# EAGLE board usb-power-switch (EAGLE 7.3.0)
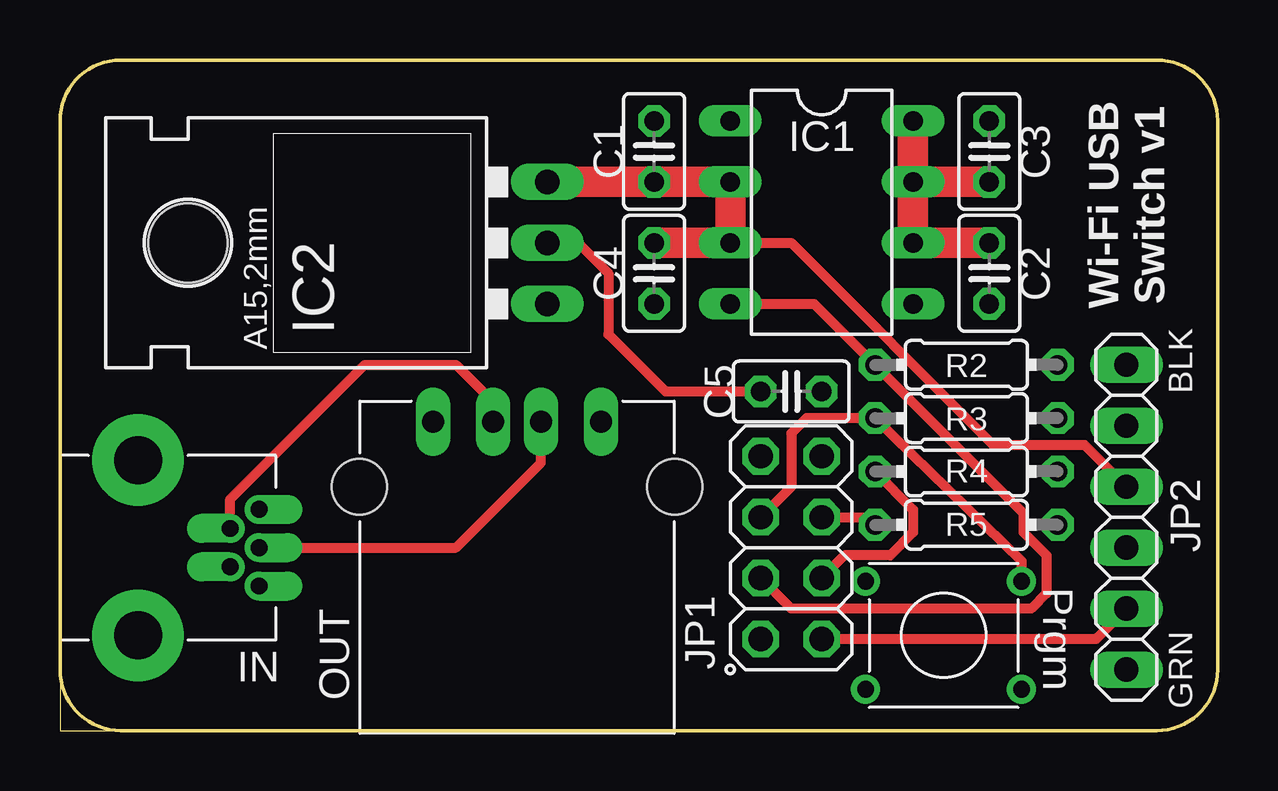
[diagram p0: board, top side]
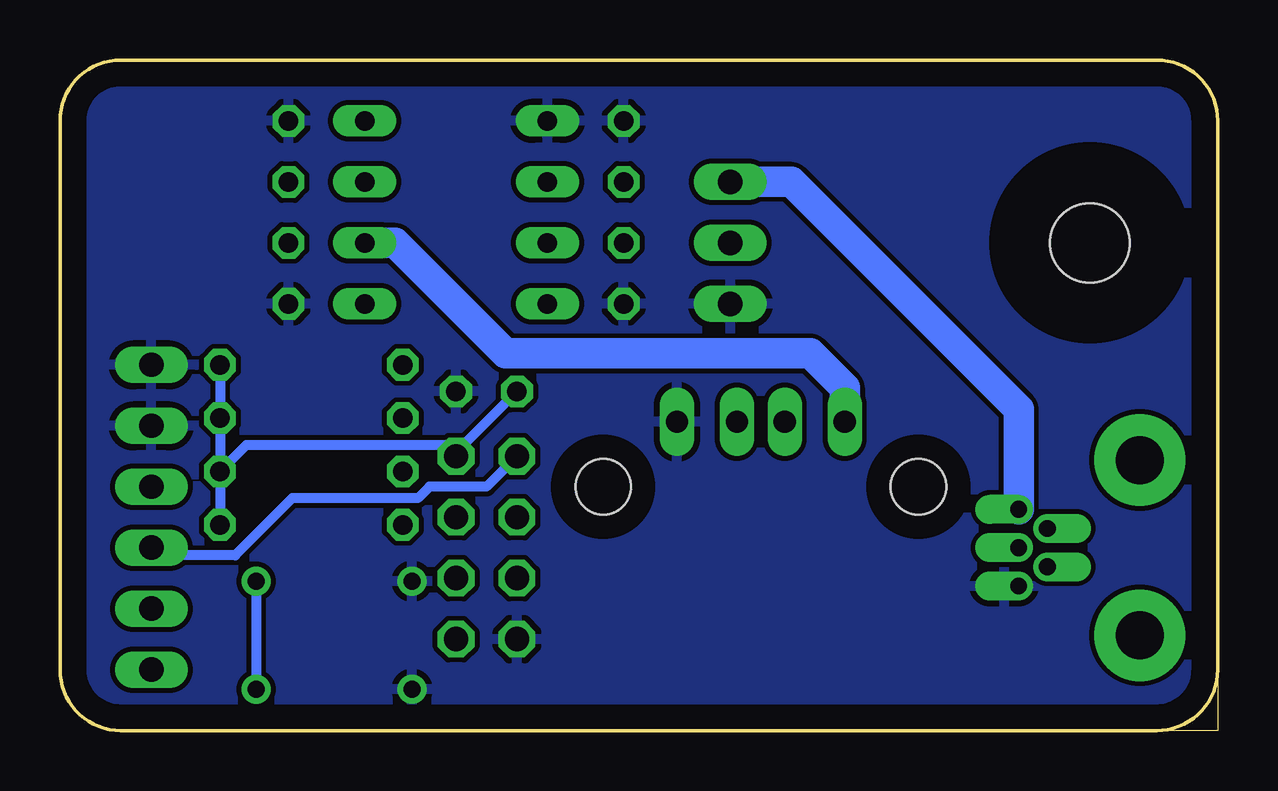
[diagram p1: board, bottom side, seen from below]

Size 48.26 x 27.94 mm. Coordinates in mm from the lower left corner, seen from the top.
Outline: 2.54,0 0,0 0,2.54
Outline: 2.54,0 45.72,0 arc90 48.26,2.54 48.26,25.4 arc90 45.72,27.94 2.54,27.94 arc90 0,25.4 0,2.54
Outline: 0,2.54 arc90 2.54,0
Copper layers (1*16): Top 0.035mm / dielectric 1.5mm / Bottom 0.035mm
Design rules "default": minimum track width 10mil, minimum drill 24mil, track to track 8mil, track to pad 8mil, pad to pad 8mil, via to via 8mil, smd to smd 8mil, copper to edge 40mil, drill to drill 8mil, minimum pad ring 10mil, minimum via ring 8mil, stop-mask expansion 4mil, vias tented up to drill 0mil, thermal gap 10mil

## Footprints (pad centres in the part's own frame; a part is rotated, then mirrored left to right if it is on the bottom)
C025-025X050 = drill 0.813 octagon: 1 -1.27,0; 2 1.27,0
DIL08 = drill 0.813 long: 1 -3.81,-3.81; 2 -1.27,-3.81; 3 1.27,-3.81; 4 3.81,-3.81; 5 3.81,3.81; 6 1.27,3.81; 7 -1.27,3.81; 8 -3.81,3.81
78XXL = drill 1.016 long: GND 0,-3.81; IN -2.54,-3.81; OUT 2.54,-3.81 | hole 3.302: 0,11.176
USB-MINI-B = drill 0.7 offset: D+ 0,8.3; D- -0.8,7.1; GND 1.6,8.3; ID 0.8,7.1; VBUS -1.6,8.3 | drill 2 pad 3.81: GND1 -3.65,3.25; GND4 3.65,3.25
2X04 = drill 1.016 octagon: 1 -3.81,-1.27; 2 -3.81,1.27; 3 -1.27,-1.27; 4 -1.27,1.27; 5 1.27,-1.27; 6 1.27,1.27; 7 3.81,-1.27; 8 3.81,1.27
1X06 = drill 1.016 long: 1 -6.35,0; 2 -3.81,0; 3 -1.27,0; 4 1.27,0; 5 3.81,0; 6 6.35,0
USB-A = drill 0.92 long: P$1 -3.5,2.71; P$2 -1,2.71; P$3 1,2.71; P$4 3.5,2.71 | hole 2.3: -6.57,0; 6.57,0
0204/7 = drill 0.813 octagon: 1 -3.81,0; 2 3.81,0
TACTILE-BUTTON-MJTP1230 = drill 0.7: P$1 -3.25,2.25; P$2 -3.25,-2.25; P$3 3.25,2.25; P$4 3.25,-2.25

## Placement (x,y rotation side)
C1  0.1uF  [C025-025X050]  24.77,24.13 90 top
C2  0.1uF  [C025-025X050]  38.73,19.05 270 top
C3  22uF  [C025-025X050]  38.73,24.13 90 top
C4  0.1uF  [C025-025X050]  24.77,19.05 270 top
C5  10uF  [C025-025X050]  30.48,14.13 0 top
IC1  TPS2024  [DIL08]  31.75,21.59 270 top
IC2  LD1117V33  [78XXL]  16.51,20.32 90 top
IN  USB-MINI-B  [USB-MINI-B]  0,7.62 270 top
JP1  ESP-01  [2X04]  30.48,7.62 90 top
JP2  FTDI 3.3V  [1X06]  44.45,8.89 270 top
OUT  USB-A  [USB-A]  19.05,10.16 0 top
R2  10K  [0204/7]  37.78,15.24 0 top
R3  10K  [0204/7]  37.78,13.02 0 top
R4  10K  [0204/7]  37.78,10.79 0 top
R5  10K  [0204/7]  37.78,8.57 0 top
S1  TACTILE-BUTTON-MJTP1230  [TACTILE-BUTTON-MJTP1230]  36.83,3.97 180 top

## Library data of the parts
C1-C5 R2-R5 = rcl
IC1 = ic-package
IC2 = SparkFun-PowerIC
IN OUT S1 = my-custom
JP1 JP2 = pinhead

## Nets
/EN: IC1.4 JP1.4 R2.1
CH_PD: JP1.3 R4.1
D+: IN.D+ OUT.P$3
D-: IN.D- OUT.P$2
DTR: JP2.6
GND: C1.2 C2.2 C3.2 C4.2 C5.2 IC1.1 IC2.IN IN.GND JP1.2 JP2.1 JP2.2 OUT.P$4 S1.P$3 S1.P$4
GPIO0: JP1.6 R3.1 S1.P$1 S1.P$2
RST: JP1.5 R5.1
RXI: JP1.8 JP2.4
TXO: JP1.1 JP2.5
VCC: C5.1 IC2.GND JP1.7 R2.2 R3.2 R4.2 R5.2
VIN: C1.1 C4.1 IC1.2 IC1.3 IC2.OUT IN.VBUS JP2.3
VOUT: C2.1 C3.1 IC1.6 IC1.7 IC1.8 OUT.P$1

## Tracks (layer width: path | path; a pad name or v marks a point on that pad's centre or on a via)
/EN
  Top 0.406: IC1.4 31.43,17.78 R2.1 40.16,9.05 40.16,8.26 41.12,7.3 41.12,5.71 40.48,5.08 30.48,5.08 JP1.4
CH_PD
  Top 0.406: R4.1 35.56,9.21 35.56,8.26 34.61,7.3 32.7,7.3 JP1.3
D+
  Top 0.406: IN.D+ 16.51,7.62 20.05,11.16 OUT.P$3
D-
  Top 0.406: IN.D- 7.1,9.64 12.7,15.24 16.51,15.24 18.05,13.7 OUT.P$2
GND
  pour Bottom: 0,0 48.26,0 48.26,27.94 0,27.94
GPIO0
  Top 0.406: JP1.6 30.48,10.16 30.48,12.38 31.11,13.02 R3.1 40.08,7.07 S1.P$2
  Bottom 0.406: S1.P$2 S1.P$1
RST
  Top 0.406: JP1.5 33.66,8.89 R5.1
RXI
  Bottom 0.406: JP1.8 30.48,10.16 32.86,10.16 33.34,9.68 38.58,9.68 40.96,7.3 44.13,7.3 JP2.4
TXO
  Top 0.406: JP2.5 43.18,3.81 JP1.1
VCC
  Top 0.406: IC2.GND 21.59,20.32 22.86,19.05 22.86,16.51 25.24,14.13 C5.1
  Bottom 0.406: R2.2 R3.2 R4.2 | R4.2 R5.2 | R4.2 40.48,11.91 32.23,11.91 JP1.7 31.75,11.59 C5.1
VIN
  Top 0.406: IC1.3 30.48,20.32 38.89,11.91 42.7,11.91 JP2.3
  Top 1.27: IC2.OUT C1.1 IC1.2 IC1.3 C4.1
  Bottom 1.27: IN.VBUS 8.3,13.38 17.78,22.86 IC2.OUT
VOUT
  Top 1.27: IC1.8 IC1.7 | IC1.7 C3.1 | IC1.7 IC1.6 C2.1
  Bottom 1.27: IC1.6 34.29,20.32 29.69,15.72 16.99,15.72 15.55,14.28 OUT.P$1

## Text on the board
tPlace: Wi-Fi USB / Switch v1 | BLK | Prgm | GRN